# Altium PCB FC-Shield.PcbDoc
Units mm, origin at the board's own origin, x right, y up, seen from the top; angles counter-clockwise.
Board outline 75 x 100 mm, 2 copper layers (Top Layer, Bottom Layer); 15 components, 17 nets, 149 pads, 0 vias.
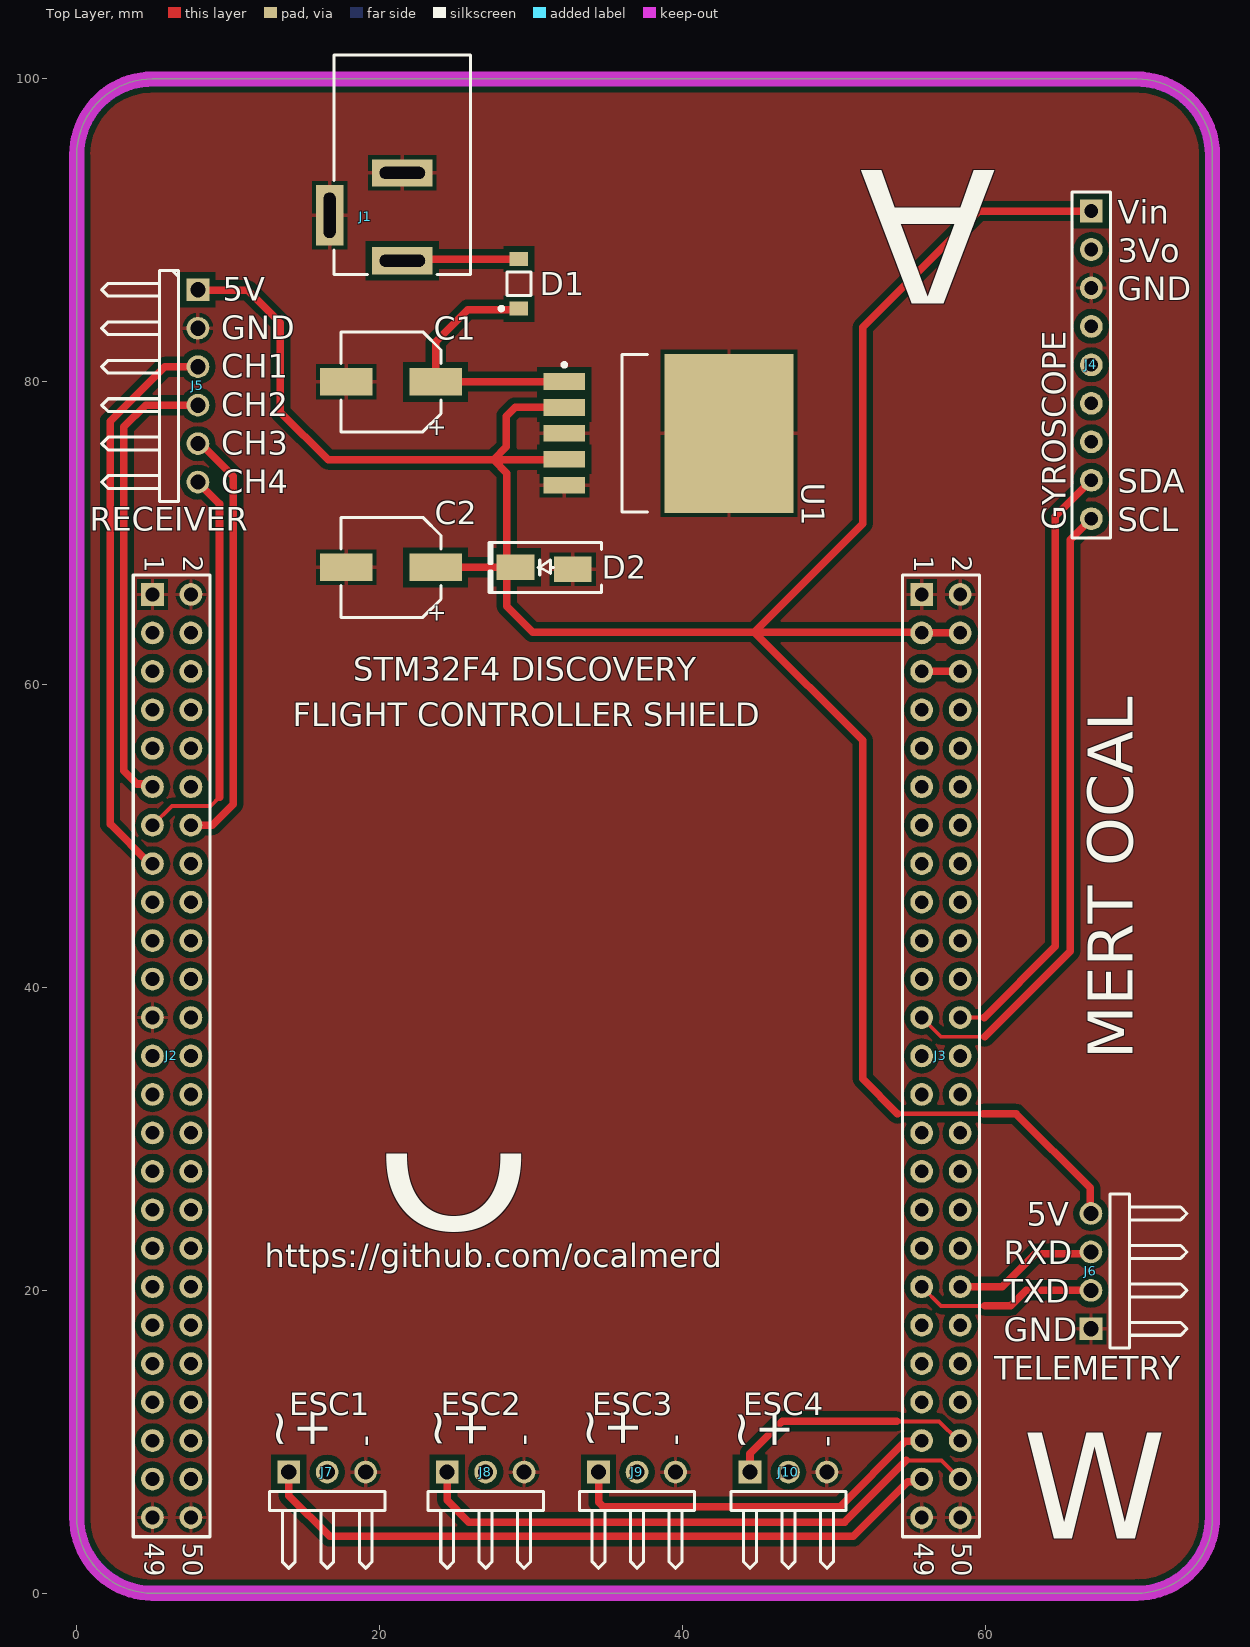
[diagram p0: Top Layer view]
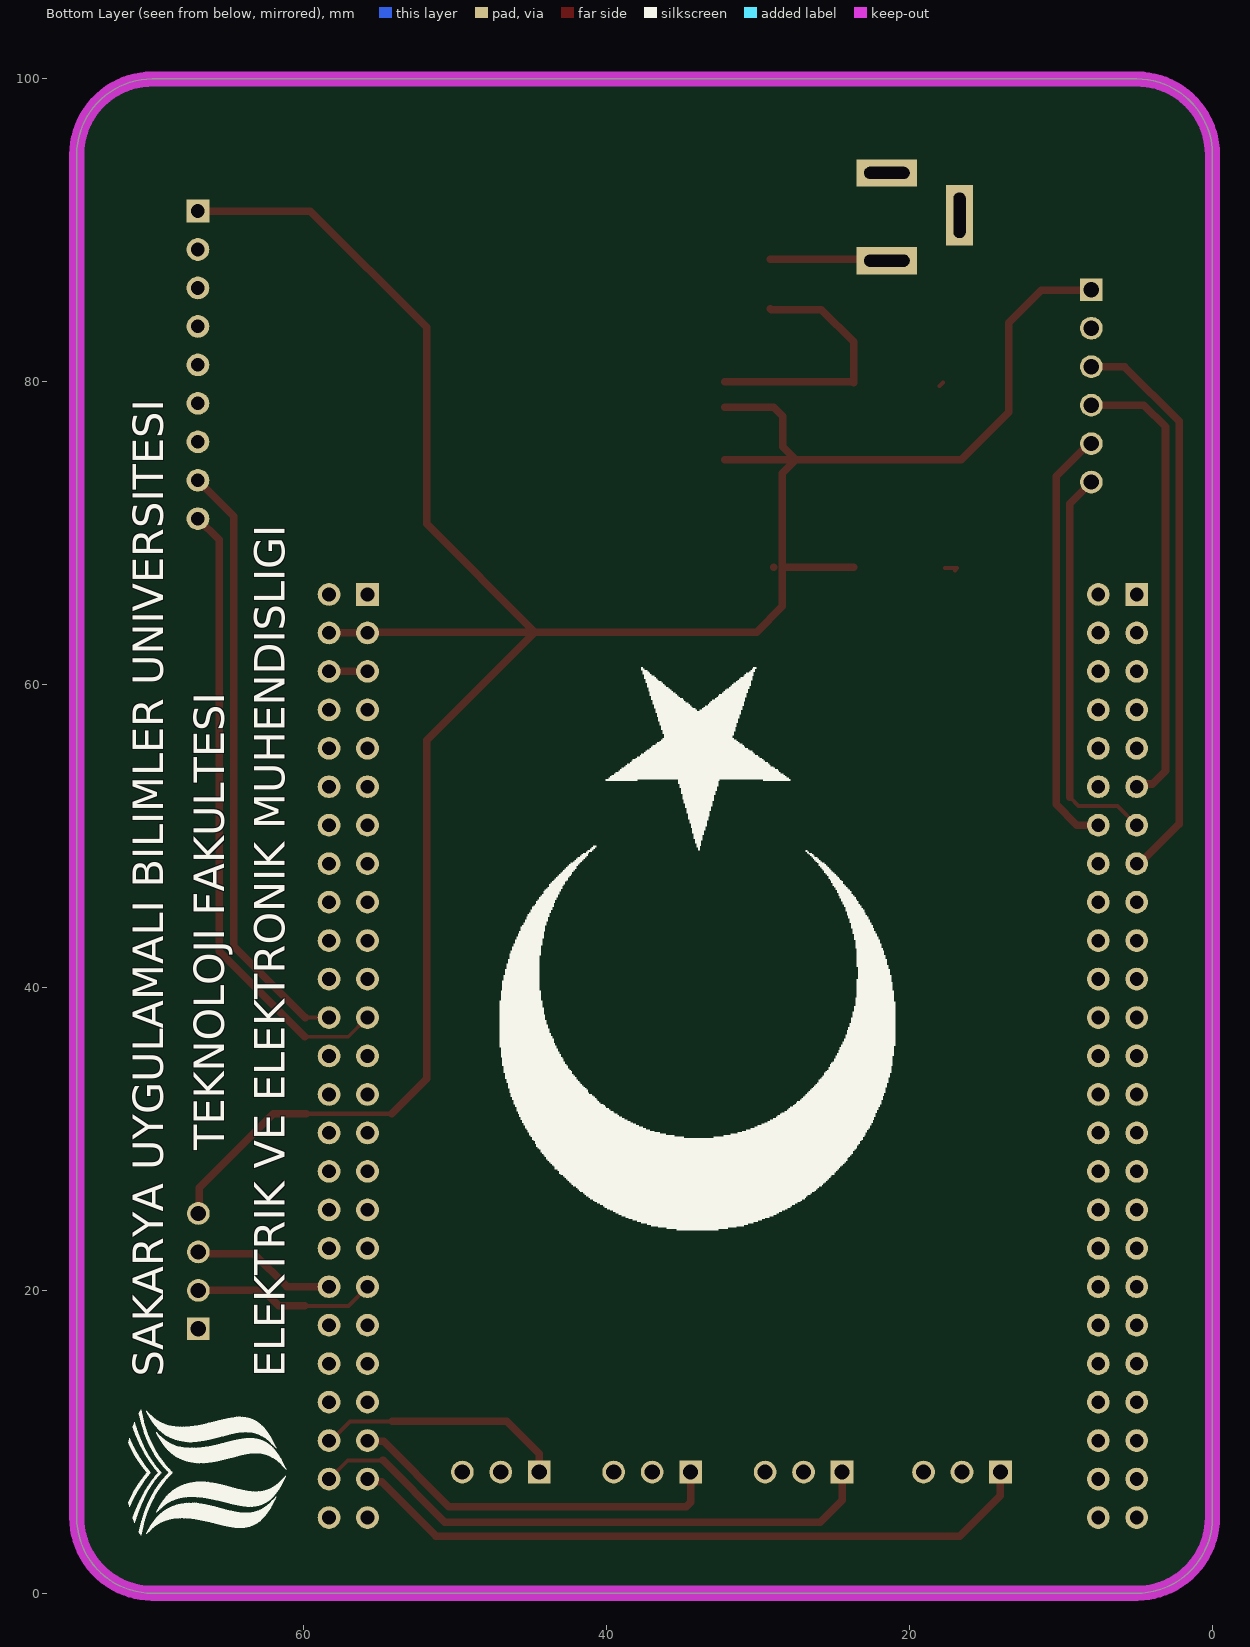
[diagram p1: Bottom Layer view, seen from below]
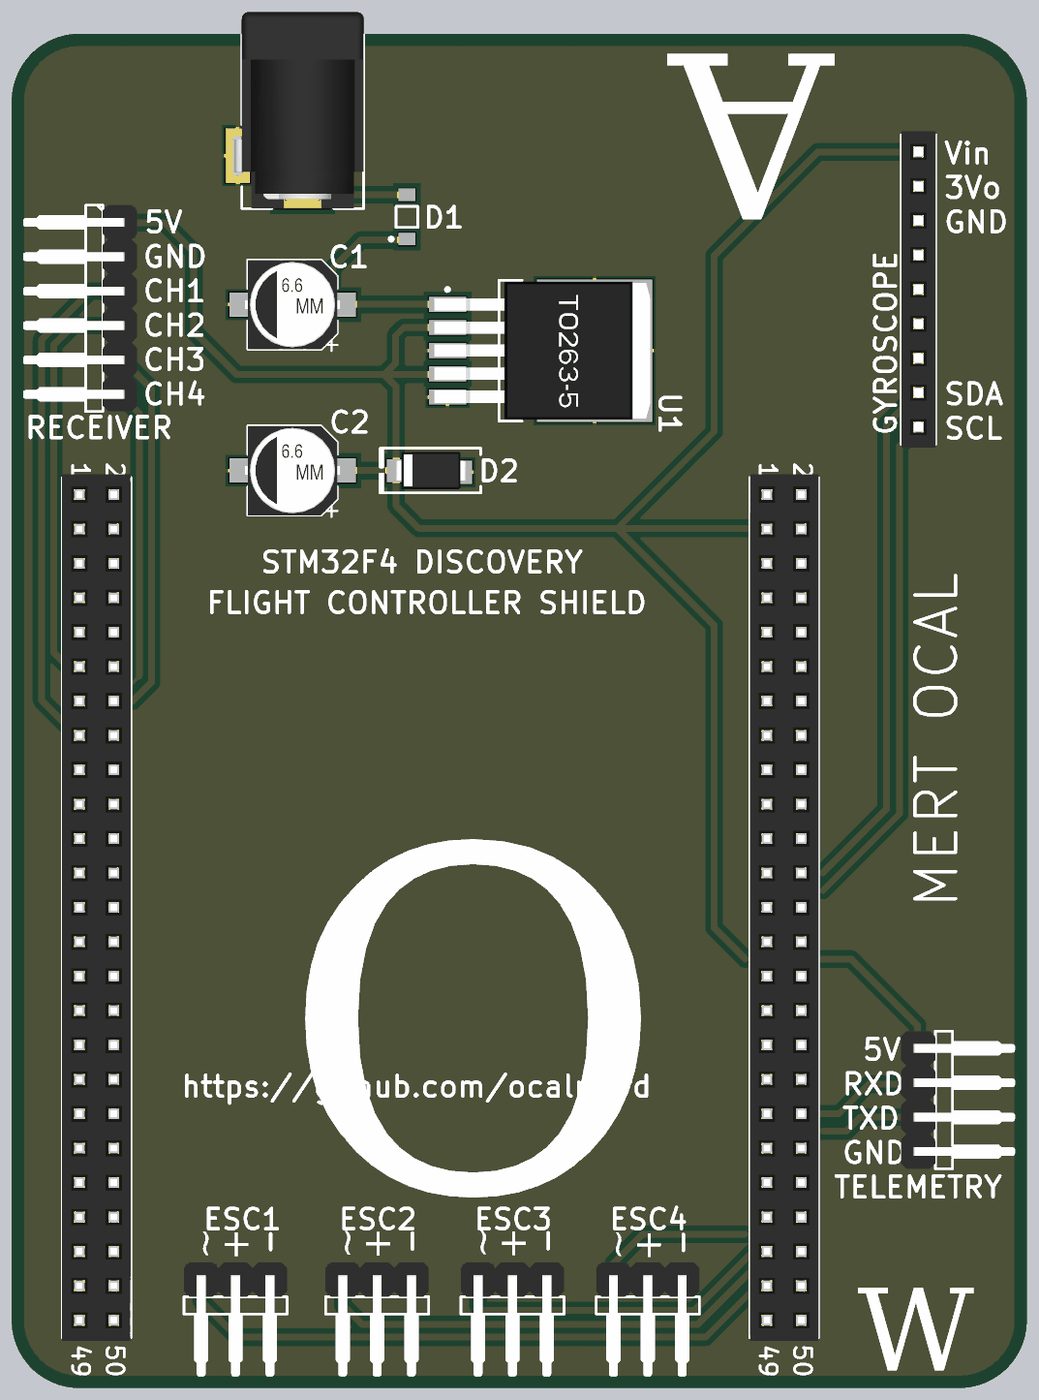
[diagram p2: 3D render of the assembled board from above, using the file's embedded part models]

## Layer stack, top to bottom
Top Solder: solder mask 0.0102, Solder Resist, Dk 3.5
Top Layer: signal copper 0.0356
Dielectric 1: dielectric 0.32, FR-4, Dk 4.8
Bottom Layer: signal copper 0.0356
Bottom Solder: solder mask 0.0102, Solder Resist, Dk 3.5

## Board outline
0,5 0,95 cw(c5,95) 5,100 70,100 cw(c70,95) 75,95 75,5 cw(c70,5) 70,0 5,0 cw(c5,5)

## Design rules (kind name [scope] priority, off if disabled: settings)
Clearance [All] p1: gap=0.4 ignorepadtopadclearanceinfootprint=FALSE except(0: Arc-Hole Track-Hole SMDPad-Hole THPad-Hole Via-Hole Fill-Hole Poly-Hole Region-Hole Text-Hole; 0.254: Arc-THPad Track-THPad)
PolygonConnect [All] p1: connectstyle=Relief reliefconductorwidth=0.254 reliefentries=4 polygonreliefangle="90 Angle" airgapwidth=0.254
RoutingVias [All] p1: holewidth=0.711 width=1.27 viastyle="Through Hole" minholewidth=0.711 minwidth=1.27 maxholewidth=0.711 maxwidth=1.27
SolderMaskExpansion [All] p1: expansion=0.102 istentingtop=FALSE
Width [All] p1: maxlimit=1.5 minlimit=0.254 preferedwidth=0.254 minimp=50.000000 maximp=50.000000 favimp=50.000000
30 further rules are at their usual default settings.

## Components (designator, comment, footprint, x,y, rotation, side; value= is the part's Value field where it differs from the comment)
C1 "CAP ALUM 220UF 20% 16V SMD" "CAP ALUM 6.6MM" 20.75,80 r180 top
C2 "CAP ALUM 220UF 20% 16V SMD" "CAP ALUM 6.6MM" 20.75,67.75 r180 top
D1 "MBR0520-HT" ONSC-SOD-123-2-425-04_V 29.2,86.475 r90 top
D2 "SMAJ5.0A TVS Diyot" "DO214AC SMA" 30.975,67.75 r180 top
J1 "DC Power Jack" 694106301002 21.5,94.35 r180 top
J2 "Left Pins Connector" HDR2X25 5,65.96 r270 top
J3 "Right Pins Connector" HDR2X25 55.8,65.96 r270 top
J4 "L3GD20H Connector" HDR1X9 67,91.28 r270 top
J5 "R9DS Receiver Connector" HDR1X6H 8,86.08 r270 top
J6 "433MHz Air Connector" HDR1X4H 66.975,17.46 r90 top
J7 "ESC1 Connector" HDR1X3H 14,8 r0 top
J8 "ESC2 Connector" HDR1X3H 24.46,8 r0 top
J9 "ESC3 Connector" HDR1X3H 34.46,8 r0 top
J10 "ESC4 Connector" HDR1X3H 44.46,8 r0 top
U1 "LM2576HVS-5.0 REG BUCK 5V 3A TO263-5" TO-263-6 38.5,76.6 r0 top

## Footprints (in the part's own frame and the unit in brackets; to place one, negate y for a bottom-side part, rotate by r counter-clockwise, add the part's x,y. Pads: shape width x height; smd on the part's side, far side on the other; paste and mask are expansions set on the pad)
694106301002 [mm] "DC Power Jack Right Angled(6.4)"
  rect 4x1.8 hole 0.8 slot 3 at 0 deg: 1(0,6.35) 2(0,0.55)
  rect 1.8x4 hole 0.8 slot 3 at 90 deg: 3(4.8,3.35)
  silkscreen extent -4.5,-7.25 4.5,7.25, body extent -4.5,-7.25 5,7.25, height 10.75
"CAP ALUM 6.6MM" [mm] "Aluminum Electrolytic Capacitor, Body 6.60x6.60x7.70mm, IPC Low Density"
  rect 3.45x1.8 smd: 1(-2.95,0) 2(2.95,0)
  silkscreen extent -3.3,-3.3 3.3,3.3, body extent -3.5,-3.3 3.5,3.3, height 7.7
"DO214AC SMA" [mm] "Molded Diode, 2-Leads, Body 4.30x2.60mm, IPC Medium Density"
  rect 2.5x1.7 smd: 1(-1.778,0.127) 2(2,0)
  silkscreen extent -3.68,-1.65 3.75,1.65, body extent -2.6,-1.37 2.6,1.37, height 2.4
HDR1X3H [mm] "Connector; Header; 3 Position; Right Angle"
  rect 1.5x1.5 hole 1.003: 1(0,0)
  round 1.5 hole 1.003: 2(2.54,0) 3(5.08,0)
  silkscreen extent -1.27,-6.35 6.35,-1.27, body extent -1.27,-7.17 6.35,1.27, height 4.76
HDR1X4H [mm] "Connector; Header; 4 Position; Right Angle"
  rect 1.5x1.5 hole 1.003: 1(0,0)
  round 1.5 hole 1.003: 2(2.54,0) 3(5.08,0) 4(7.62,0)
  silkscreen extent -1.27,-6.35 8.89,-1.27, body extent -1.27,-7.17 8.89,1.27, height 4.76
HDR1X6H [mm] "Connector; Header; 6 Position; Right Angle"
  rect 1.5x1.5 hole 1.003: 1(0,0)
  round 1.5 hole 1.003: 2(2.54,0) 3(5.08,0) 4(7.62,0) 5(10.16,0) 6(12.7,0)
  silkscreen extent -1.27,-6.35 13.97,-1.27, body extent -1.27,-7.17 13.97,1.27, height 4.76
HDR1X9 [mm] "Connector; Header; 9 Position"
  rect 1.5x1.5 hole 0.9: 1(0,0)
  round 1.5 hole 0.9: 2(2.54,0) 3(5.08,0) 4(7.62,0) 5(10.16,0) 6(12.7,0) 7(15.24,0) 8(17.78,0) 9(20.32,0)
  silkscreen extent -1.27,-1.27 21.59,1.27, body extent -1.52,-1.27 21.84,1.27, height 8.5
HDR2X25 [mm] "Connector; Header; 25x2 Position"
  rect 1.5x1.5 hole 0.9: 1(0,0)
  round 1.5 hole 0.9: 2(0,2.54) 3(2.54,0) 4(2.54,2.54) 5(5.08,0) 6(5.08,2.54) 7(7.62,0) 8(7.62,2.54) 9(10.16,0) 10(10.16,2.54) 11(12.7,0) 12(12.7,2.54) 13(15.24,0) 14(15.24,2.54) 15(17.78,0) 16(17.78,2.54) 17(20.32,0) 18(20.32,2.54) 19(22.86,0) 20(22.86,2.54) 21(25.4,0) 22(25.4,2.54) 23(27.94,0) 24(27.94,2.54) 25(30.48,0) 26(30.48,2.54) 27(33.02,0) 28(33.02,2.54) 29(35.56,0) 30(35.56,2.54) 31(38.1,0) 32(38.1,2.54) 33(40.64,0) 34(40.64,2.54) 35(43.18,0) 36(43.18,2.54) 37(45.72,0) 38(45.72,2.54) 39(48.26,0) 40(48.26,2.54) 41(50.8,0) 42(50.8,2.54) 43(53.34,0) 44(53.34,2.54) 45(55.88,0) 46(55.88,2.54) 47(58.42,0) 48(58.42,2.54) 49(60.96,0) 50(60.96,2.54)
  silkscreen extent -1.27,-1.27 62.23,3.81, body extent -1.52,-1.27 62.48,3.81, height 8.5
ONSC-SOD-123-2-425-04_V [mm] "SOD, 2-Leads, Body 2.69x1.6mm"
  rect 0.91x1.22 smd: 1(-1.635,0) 2(1.635,0)
  silkscreen extent -1.76,-0.8 0.78,1.28, body extent -1.35,-0.8 1.35,0.8, height 1.35
TO-263-6 [mm]
  rect 2.75x1.1 smd: 1(-6.3,3.42) 2(-6.3,1.71) 3(-6.3,0.01) 4(-6.3,-1.71) 5(-6.3,-3.42)
  rect 8.5x10.5 smd: 6(4.572,0)
  round 0.5 on Mech1: ""(-6.7,4.4)
  silkscreen extent -6.42,-5.2 -0.8,5.2, body extent -7.28,-5.1 8.67,5.1, height 4.4

## Part data
C1 C2: library part "100uF 16V Aluminum(POL)", "220µF 16V Aluminum Electrolytic Capacitors Radial, Can - SMD  1000 Hrs @ 105°C", +Sicaklik=+105, -Sicaklik=-40, Cins=Kondansator, Deger="220uF 16V", Epoksi Bilgisi=VAR, Kaplama Bilgisi=UYGUN, Kılıf="6.60mm x 6.60mm", Lehim Yöntemi=SMD, MSL="1 (Unlimited)", Nero Kodu=NE-S-00400, Uretici Kodu=EEE-HA1C101WP, Yıkama Bilgisi=UYGUN
D1: library part MBR0520LT1, "20V 0.5A Schottky Power Rectifier, 2-Pin SOD-123, Tape and Reel", Manufacturer="On Semiconductor", Supplier Part Number 1=MBR0520LT1OSCT-ND, ComponentLink1Description="Manufacturer URL", ComponentLink1URL=http://www.onsemi.com/, ComponentLink2Description=Datasheet, ComponentLink2URL=http://www.onsemi.cn/pub_link/Collateral/MBR0520LT1-D.PDF, ComponentLink3Description="Package Specification", ComponentLink3URL=http://www.onsemi.com/pub_link/Collateral/425-04.PDF, Configuration=Single, DatasheetVersion="Rev. 6", IFSM Max (A)=5.5, Mounting Technology="Surface Mount", PackageDescription="2-Pin SOD, Body 1.6 x 2.69 mm", PackageReference=SOD-123-2-425-04, PackageVersion="Rev. G, 10/2009", Packing="Tape and Reel", PartNumber=MBR0520LT1, RoHS=FALSE, Supplier 1=Digi-Key
D2: library part SMAJ5.0A, "Schottky Rectifier", +Sicaklik=+150, -Sicaklik=-55, Cins=Diyot, ComponentLink1Description=https://www.digikey.com/product-detail/en/littelfuse-inc/SMAJ5.0A/SMAJ5.0ALFTR-ND/762250, Deger=SMAJ5.0A, Epoksi Bilgisi=YOK, Kaplama Bilgisi=UYGUN, Kılıf=DO-214AC, Lehim Yöntemi=SMD, MSL="1 (Unlimited)", Nero Kodu=NE-S-00888, Uretici Kodu=SMAJ5.0A, Yıkama Bilgisi=UYGUN
J1: library part 694106301002, "DC Power Jack Connector WR-DC, Male, Right Angled, THT, 5 A, 24 V", Operating Temperature="-40 to 85 degC", Rated Current="5 A", Working Voltage="24 V", ComponentLink1Description=Manufacturer, ComponentLink1URL=http://www.we-online.de, ComponentLink2Description=Datasheet, ComponentLink2URL=http://katalog.we-online.de/em/datasheet/6941xx301002.pdf, Gender=Male, Mounting Technology=THT, Opening Diameter="6.4 mm", Orientation="Right Angled", Packaging=Bag, Part Number=694106301002, Plug Inner Diameter="2.05 mm", Plug Outer Diameter="5.5 mm", Published Date="August 2018", Publisher="Wurth Elektronik"
J2 J3: library part "Header 25X2", "Header, 25-Pin, Dual row", LatestRevisionDate=17-Jul-2002, LatestRevisionNote="Re-released for DXP Platform.", Publisher="Altium Limited"
J4: library part "Header 9", "Header, 9-Pin", LatestRevisionDate=17-Jul-2002, LatestRevisionNote="Re-released for DXP Platform.", Publisher="Altium Limited"
J5: library part "Header 6H", "Header, 6-Pin, Right Angle", LatestRevisionDate=17-Jul-2002, LatestRevisionNote="Re-released for DXP Platform.", Publisher="Altium Limited"
J6: library part "Header 4H", "Header, 4-Pin, Right Angle", LatestRevisionDate=17-Jul-2002, LatestRevisionNote="Re-released for DXP Platform.", Publisher="Altium Limited"
J7 J8 J9 J10: library part "Header 3H", "Header, 3-Pin, Right Angle", LatestRevisionDate=17-Jul-2002, LatestRevisionNote="Re-released for DXP Platform.", Publisher="Altium Limited"
U1: library part LM2576HVS-5.0--, "Buck Switching Regulator IC Positive Fixed 5V 1 Output 3A TO-263-6, D²Pak (5 Leads + Tab), TO-263BA", +Sicaklik=+125, -Sicaklik=-40, Cins=IC, Deger=LM2576HVS-5.0, Epoksi Bilgisi=YOK, Kaplama Bilgisi=UYGUN, Kılıf=D2PAK-3, Lehim YöntemiLehim Yönetmi=SMD, MSL="1 (Unlimited)", Uretici Kodu=LM2576HVS-5.0, Yıkama Bilgisi=UYGUN

## Nets (pads, with @x,y where several pads share a name; then routed paths per layer and width w, separated by ;. In a path a pad name is that pad's centre, name@x,y a point inside that pad or via, vN(x,y) a via of type N, cw(c..) or ccw(c..) an arc to the next point about the centre after c; other vN are vias at no path point)
+3V3: J3.5 J3.6 | length 2.5
  Top Layer w0.5: J3.5 J3.6
+5V: C2.1 D2.2 J3.3 J3.4 J4.1 J5.1 J6.4 U1.2 U1.4 | length 178.6
  Top Layer w0.254: J5.1 J5.1@8.03,86.05
  Top Layer w0.3: 54.2,31.675 59.85,31.675
  Top Layer w0.5: J5.1@8.03,86.05 11.3,86.05 13.45,83.9 13.45,78 16.6,74.85 27.525,74.85 ; C2.1 D2.2@28.4,67.75 ; U1.4@32.2,74.85 27.525,74.85 ; U1.2 28.96,78.31 28.375,77.725 28.375,75.7 27.525,74.85 ; 54.2,31.675 51.9,33.975 51.9,56.325 44.75,63.475 ; J3.4 J3.3 55.745,63.475 44.75,63.475 ; 59.85,31.675 62.025,31.675 66.925,26.775 66.925,25.13 J6.4 ; J4.1 59.58,91.28 51.9,83.6 51.9,70.625 44.75,63.475 ; 27.525,74.85 28.4,73.975 D2.2@28.4,67.75 ; D2.2@28.4,67.75 28.4,65.175 30.1,63.475 31.325,63.475 44.75,63.475
+12V: C1.1 D1.1 U1.1 | length 17.6
  Top Layer w0.5: C1.1@23.7,79.95 23.77,80.02 U1.1 ; C1.1 23.7,82.65 25.825,84.775 29.135,84.775 D1.1
+12V_E: D1.2 J1.1 | length 7.7
  Top Layer w0.5: J1.1 21.61,88.11 D1.2
CH1_S: J2.15 J5.3 | length 37.6
  Top Layer w0.5: J2.15@4.82,48.18 2.2,50.8 2.2,77.391 5.809,81 J5.3
CH2_S: J2.11 J5.4 | length 30.5
  Top Layer w0.5: J2.11 4.819,53.441 3.984,53.441 3.1,54.325 3.1,77.019 4.541,78.46 J5.4
CH3_S: J2.14 J5.5 | length 28.2
  Top Layer w0.254: J5.5 J5.5@8.18,75.92
  Top Layer w0.5: J2.14 8.945,50.72 10.325,52.1 10.325,73.775 J5.5@8.18,75.92
CH4_S: J2.13 J5.6 | length 26.6
  Top Layer w0.254: J2.13 6.28,52 8.85,52 9.425,52.575
  Top Layer w0.5: J5.6 9.425,71.955 9.425,52.575
ESC1_S: J3.47 J7.1 | length 46
  Top Layer w0.254: J3.47 J3.47
  Top Layer w0.5: J7.1 14,6.45 16.7,3.75 51.275,3.75 54.874,7.349 55.609,7.349 J3.47
ESC2_S: J3.48 J8.1 | length 38.4
  Top Layer w0.254: 54.898,8.775 57.105,8.775 J3.48
  Top Layer w0.5: J8.1 24.46,6.14 25.9,4.7 50.7,4.7 54.775,8.775
ESC3_S: J3.45 J9.1 | length 25.2
  Top Layer w0.5: J9.1 34.46,6.018 34.753,5.725 50.425,5.725 54.725,10.025 55.745,10.025 J3.45
ESC4_S: J3.46 J10.1 | length 16.5
  Top Layer w0.254: 54.15,11.35 56.949,11.35 58.219,10.08 J3.46
  Top Layer w0.5: J10.1 44.46,9.21 46.6,11.35 54.15,11.35
GND: C1.2 C2.2 D2.1 J1.2 J1.3 J2.1 J2.2 J2.23 J2.49 J2.50 J3.1 J3.2 J3.49 J3.50 J4.3 J5.2 J6.1 J7.3 J8.3 J9.3 J10.3 U1.3 U1.5 U1.6 | length 2
  Top Layer w0.254: C2.2@17,67.55 16.85,67.7 C2.2@17.675,67.7 ; C1.2@17.8,79.95 C1.2@18.025,79.725 ; J1.2@21.25,93.55 J1.2 ; J10.3@49.35,7.81 J10.3
RX: J3.38 J6.3 | length 9.6
  Top Layer w0.254: J6.3@66.86,22.425 J6.3
  Top Layer w0.5: J3.38 61.115,20.24 63.3,22.425 J6.3@66.86,22.425
SCL: J3.23 J4.9 | length 41.8
  Top Layer w0.254: J3.23 57.07,36.75 59.95,36.75
  Top Layer w0.5: 59.95,36.75 65.6,42.4 65.6,69.56 J4.9
SDA: J3.24 J4.8 | length 40
  Top Layer w0.254: J3.24 59.92,38.02
  Top Layer w0.5: 59.92,38.02 64.625,42.725 64.625,71.125 J4.8
TX: J3.37 J6.2 | length 12.1
  Top Layer w0.254: J3.37 57.065,18.975 59.95,18.975
  Top Layer w0.5: 59.95,18.975 61.675,18.975 62.7,20 J6.2
pads on no net: J2.3 J2.4 J2.5 J2.6 J2.7 J2.8 J2.9 J2.10 J2.12 J2.16 J2.17 J2.18 J2.19 J2.20 J2.21 J2.22 J2.24 J2.25 J2.26 J2.27 J2.28 J2.29 J2.30 J2.31 J2.32 J2.33 J2.34 J2.35 J2.36 J2.37 J2.38 J2.39 J2.40 J2.41 J2.42 J2.43 J2.44 J2.45 J2.46 J2.47 J2.48 J3.7 J3.8 J3.9 J3.10 J3.11 J3.12 J3.13 J3.14 J3.15 J3.16 J3.17 J3.18 J3.19 J3.20 J3.21 J3.22 J3.25 J3.26 J3.27 J3.28 J3.29 J3.30 J3.31 J3.32 J3.33 J3.34 J3.35 J3.36 J3.39 J3.40 J3.41 J3.42 J3.43 J3.44 J4.2 J4.4 J4.5 J4.6 J4.7 J7.2 J8.2 J9.2 J10.2 U1.

## Polygon pours and split planes (outlines as drawn)
GND on Top Layer "GND_L01_P005" (solid, pour order 5): 0,3 3,0 72,0 75,3 75,96.5 72.406,100 3,100 0,97
no net on Top Layer "NONET_L01_P004" (solid, pour order 4): 0,0
no net on Top Layer "NONET_L01_P003" (solid, pour order 3): 75.425,100.025
no net on Top Layer "NONET_L01_P002" (solid, pour order 2): 34.35,53.375
no net on Top Layer "NONET_L01_P000" (solid, pour order 0): 7.825,79.075

## Keep-outs
Keep-Out Layer:
  the board outline again, w1

## Other copper
Top Layer:
  pour cut-out: 52.675,96.675

## Silkscreen, mask and mechanical layers (free items; w line width, h text height)
Top Overlay:
  text "A" at 60.719,98.542 h24 r180
  text "Vin" at 68.754,90.454 h1.54
  text "3Vo" at 68.754,87.914 h1.54
  text "GND" at 68.754,85.374 h1.54
  text "5V" at 9.654,85.354 h1.54
  text "GND" at 9.554,82.814 h1.54
  text "CH1" at 9.554,80.274 h1.54
  text "CH2" at 9.554,77.734 h1.54
  text "CH3" at 9.554,75.194 h1.54
  text "SDA" at 68.754,72.674 h1.54
  text "CH4" at 9.554,72.654 h1.54
  text "GYROSCOPE" at 65.296,70.204 h1.54 r90
  text "RECEIVER" at 0.854,70.179 h1.54
  text "SCL" at 68.754,70.134 h1.54
  text "STM32F4 DISCOVERY" at 18.254,60.254 h1.54
  text "FLIGHT CONTROLLER SHIELD" at 14.254,57.254 h1.54
  text "MERT OCAL" at 69.746,35.254 h3 r90
  text "5V" at 62.729,24.254 h1.54
  text "RXD" at 61.229,21.714 h1.54
  text "https://github.com/ocalmerd" at 12.404,21.542 h1.54
  text "TXD" at 61.229,19.174 h1.54
  text "GND" at 61.229,16.644 h1.54
  text "O" at 19.726,14.547 h50
  text "TELEMETRY" at 60.604,14.104 h1.54
  text "ESC1" at 14.029,11.754 h1.5
  text "ESC2" at 24.029,11.754 h1.5
  text "ESC3" at 34.029,11.754 h1.5
  text "ESC4" at 44.029,11.754 h1.5
  text "-" at 40.231,9.754 h1.54 r90
  text "-" at 30.206,9.729 h1.54 r90
  text "-" at 19.731,9.679 h1.54 r90
  text "-" at 50.231,9.629 h1.54 r90
  text "~" at 35.717,9.575 h4 r90
  text "+" at 37.865,9.575 h4 r90
  text "~" at 25.692,9.55 h4 r90
  text "+" at 27.84,9.55 h4 r90
  text "~" at 15.217,9.5 h4 r90
  text "+" at 17.365,9.5 h4 r90
  text "~" at 45.717,9.45 h4 r90
  text "+" at 47.865,9.45 h4 r90
  text "W" at 62.475,1.275 h12
Bottom Overlay:
  drawing of 9 lines, arcs and shapes, not listed
  text "TEKNOLOJI FAKULTESI" at 65.254,29.254 h2 r270
  text "SAKARYA UYGULAMALI BILIMLER UNIVERSITESI" at 69.3,14.3 h2 r270
  text "ELEKTRIK VE ELEKTRONIK MUHENDISLIGI" at 61.254,14.254 h2 r270

## Text inside footprints (layer, text, board x,y; h text height)
C1: Top Overlay "+" at 24.433,77.46 h1.14 r180
C2: Top Overlay "+" at 24.433,65.21 h1.14 r180
J2: Top Overlay "2" at 7.032,68.5 h1.27 r270; Top Overlay "1" at 4.492,68.5 h1.27 r270; Top Overlay "49" at 4.492,3.35 h1.27 r270; Top Overlay "50" at 7.032,3.35 h1.27 r270
J3: Top Overlay "2" at 57.832,68.5 h1.27 r270; Top Overlay "1" at 55.292,68.5 h1.27 r270; Top Overlay "49" at 55.292,3.35 h1.27 r270; Top Overlay "50" at 57.832,3.35 h1.27 r270